# EAGLE board CT_schematic (EAGLE 7.6.0)

Size 100 x 80 mm. Coordinates in mm from the lower left corner, seen from the top.
Outline: 0,0 100,0 100,80 0,80 0,0
Copper layers (1*16): Top 0.035mm / dielectric 1.5mm / Bottom 0.035mm
Design rules "default": minimum track width 10mil, minimum drill 24mil, track to track 8mil, track to pad 8mil, pad to pad 8mil, via to via 8mil, smd to smd 8mil, copper to edge 40mil, drill to drill 8mil, minimum pad ring 10mil, minimum via ring 8mil, stop-mask expansion 4mil, vias tented up to drill 0mil, thermal gap 10mil

## Footprints (pad centres in the part's own frame; a part is rotated, then mirrored left to right if it is on the bottom)
C0603 = smd 0.8 x 0.8: 1 -0.762,0; 2 0.762,0
C0402 = smd 0.5 x 0.5: 1 -0.508,0; 2 0.508,0
C0805 = smd 1.2 x 1.3: 1 -1.016,0; 2 1.016,0
C1210 = smd 1.2 x 2.5: 1 -1.524,0; 2 1.524,0
EXV-9B = smd 2.718 x 1.778: 1 -2.108,0; 2 2.108,0
EXV-9H = smd 3.505 x 1.676: 1 -2.857,0; 2 2.857,0
L1210 = smd 1.2 x 2.5: 1 -1.524,0; 2 1.524,0
PJ-037B_PACKAGE = drill 3.7 square: 1 12,0 | drill 3.2 square: 2 6,0
R0603 = smd 0.8 x 0.8: 1 -0.762,0; 2 0.762,0
UFQFPN48 = smd 0.559 x 0.305: 1 -3.375,2.751; 2 -3.375,2.251; 3 -3.375,1.75; 4 -3.375,1.25; 5 -3.375,0.75; 6 -3.375,0.25; 7 -3.375,-0.25; 8 -3.375,-0.75; 9 -3.375,-1.25; 10 -3.375,-1.75; 11 -3.375,-2.251; 12 -3.375,-2.751; 25 3.375,-2.751; 26 3.375,-2.251; 27 3.375,-1.75; 28 3.375,-1.25; 29 3.375,-0.75; 30 3.375,-0.25; 31 3.375,0.25; 32 3.375,0.75; 33 3.375,1.25; 34 3.375,1.75; 35 3.375,2.251; 36 3.375,2.751 | smd 0.305 x 0.559: 13 -2.751,-3.375; 14 -2.251,-3.375; 15 -1.75,-3.375; 16 -1.25,-3.375; 17 -0.75,-3.375; 18 -0.25,-3.375; 19 0.25,-3.375; 20 0.75,-3.375; 21 1.25,-3.375; 22 1.75,-3.375; 23 2.251,-3.375; 24 2.751,-3.375; 37 2.751,3.375; 38 2.251,3.375; 39 1.75,3.375; 40 1.25,3.375; 41 0.75,3.375; 42 0.25,3.375; 43 -0.25,3.375; 44 -0.75,3.375; 45 -1.25,3.375; 46 -1.75,3.375; 47 -2.251,3.375; 48 -2.751,3.375 | smd 5.588 x 5.588: 49 0,0
SOT-23-8 = smd 0.4 x 1.2: 1 -0.975,-1.3; 2 -0.325,-1.3; 3 0.325,-1.3; 4 0.975,-1.3; 5 0.975,1.3; 6 0.325,1.3; 7 -0.325,1.3; 8 -0.975,1.3
182-009-MALE = drill 1.194 pad 1.524 octagon: 1 -5.537,10.923; 2 -2.769,10.923; 3 0,10.923; 4 2.769,10.923; 5 5.537,10.923; 6 -4.153,8.08; 7 -1.384,8.08; 8 1.384,8.08; 9 4.153,8.08 | hole 3.048: -12.446,9.501; 12.446,9.501
SSOP-20 = smd 1.651 x 0.432: 1 -3.48,2.925; 2 -3.48,2.275; 3 -3.48,1.625; 4 -3.48,0.975; 5 -3.48,0.325; 6 -3.48,-0.325; 7 -3.48,-0.975; 8 -3.48,-1.625; 9 -3.48,-2.275; 10 -3.48,-2.925; 11 3.48,-2.925; 12 3.48,-2.275; 13 3.48,-1.625; 14 3.48,-0.975; 15 3.48,-0.325; 16 3.48,0.325; 17 3.48,0.975; 18 3.48,1.625; 19 3.48,2.275; 20 3.48,2.925
HTSS-105-01-G-D = drill 1 pad 1.8 square: 1 0,0 | drill 1 pad 1.8: 2 0,2.54; 3 2.54,0; 4 2.54,2.54; 5 5.08,0; 6 5.08,2.54; 7 7.62,0; 8 7.62,2.54; 9 10.16,0; 10 10.16,2.54
TDFN-8/6MM = smd 0.3 x 0.75: 1 0,0; 2 0.5,0; 3 1,0; 4 1.5,0; 5 1.5,3; 6 1,3; 7 0.5,3; 8 0,3
TSSOP20-I = smd 0.4 x 1.35: 1 -2.925,-2.875; 2 -2.275,-2.875; 3 -1.625,-2.875; 4 -0.975,-2.875; 5 -0.325,-2.875; 6 0.325,-2.875; 7 0.975,-2.875; 8 1.625,-2.875; 9 2.275,-2.875; 10 2.925,-2.875; 11 2.925,2.875; 12 2.275,2.875; 13 1.625,2.875; 14 0.975,2.875; 15 0.325,2.875; 16 -0.325,2.875; 17 -0.975,2.875; 18 -1.625,2.875; 19 -2.275,2.875; 20 -2.925,2.875
QFN-28 = smd 0.813 x 0.305: 1 -2.451,1.5; 2 -2.451,1; 3 -2.451,0.5; 4 -2.451,0; 5 -2.451,-0.5; 6 -2.451,-1; 7 -2.451,-1.5; 15 2.451,-1.5; 16 2.451,-1; 17 2.451,-0.5; 18 2.451,0; 19 2.451,0.5; 20 2.451,1; 21 2.451,1.5 | smd 0.305 x 0.813: 8 -1.5,-2.451; 9 -1,-2.451; 10 -0.5,-2.451; 11 0,-2.451; 12 0.5,-2.451; 13 1,-2.451; 14 1.5,-2.451; 22 1.5,2.451; 23 1,2.451; 24 0.5,2.451; 25 0,2.451; 26 -0.5,2.451; 27 -1,2.451; 28 -1.5,2.451 | smd 3.607 x 3.607: 29 0,0
SJ-43515TS-SMT-TR = smd 2.2 x 3: 1 0.6,-7.4; 4 3.4,-7.4 | smd 3 x 3: 2 12.8,-7.4; 5 17,-3 | smd 2 x 3: 3 5.3,0; 6 2.5,0 | drill 1.8: P$7 4.5,-3.69; P$8 11.54,-3.69
ABS07-32.768KHZ-7-T = smd 1.1 x 2.4: 1 -2.5,0; 2 0,0
ABLS-25.000MHZ-B2F-T = smd 5.6 x 2.8: 1 -3.81,0; 2 5.69,0
ABLS-12.288MHZ-B4-T = smd 5.6 x 2.8: 1 -3.81,0; 2 5.69,0
LP2954 = smd 1.6 x 0.6: 1 -2.475,1.905 | smd 1.55 x 0.6: 2 -2.475,0.635; 3 -2.475,-0.635; 4 -2.475,-1.905; 5 2.475,-1.905; 6 2.475,-0.635; 7 2.475,0.635; 8 2.475,1.905
SON-6 = smd 0.55 x 0.3: 1 -0.355,0.5 | smd 0.52 x 0.3: 2 -0.37,0; 3 -0.37,-0.5; 4 0.37,-0.5; 5 0.37,0; 6 0.37,0.5
SW_4-1437565-2 = smd 1.4 x 2.1: 1 -2.23,4.55; 2 -2.23,-4.55; 3 2.23,4.55; 4 2.23,-4.55
LGM67K-G1J2-24-Z = smd 0.8 x 1.4: A -2,0; C 0,0
NC7SZ125M5X = smd 1.3 x 0.7: 1 -1.3,0.95; 2 -1.3,0; 3 -1.3,-0.95; 4 1.3,-0.95; 5 1.3,0.95

## Placement (x,y rotation side)
C1  1e-06  [C0603]  -48.26,81.28 0 top  (outside the outline)
C2  1e-07  [C0603]  -52.07,81.28 0 top  (outside the outline)
C3  1e-07  [C0603]  -55.88,81.28 0 top  (outside the outline)
C4  1e-07  [C0603]  -59.69,81.28 0 top  (outside the outline)
C5  1e-07  [C0603]  -63.5,81.28 0 top  (outside the outline)
C6  1e-07  [C0603]  -67.31,81.28 0 top  (outside the outline)
C7  4.7e-06  [C0603]  -44.45,81.28 0 top  (outside the outline)
C8  1e-08  [C0603]  -71.12,81.28 0 top  (outside the outline)
C9  1e-06  [C0603]  -74.93,81.28 0 top  (outside the outline)
C10  1e-07  [C0603]  -78.74,81.28 0 top  (outside the outline)
C11  1e-11  [C0402]  -66.04,86.36 0 top  (outside the outline)
C12  1e-11  [C0402]  -69.85,86.36 0 top  (outside the outline)
C13  1e-11  [C0402]  -73.66,86.36 0 top  (outside the outline)
C14  1e-11  [C0402]  -77.47,86.36 0 top  (outside the outline)
C15  1e-07  [C0402]  -81.28,86.36 0 top  (outside the outline)
C16  1e-06  [C0603]  -82.55,81.28 0 top  (outside the outline)
C17  1e-06  [C0603]  -86.36,81.28 0 top  (outside the outline)
C18  1e-06  [C0603]  -15.24,86.36 0 top  (outside the outline)
C19  4.7e-06  [C0805]  -71.12,68.58 0 top  (outside the outline)
C20  1e-08  [C0402]  -85.09,86.36 0 top  (outside the outline)
C21  1e-08  [C0402]  -15.24,91.44 0 top  (outside the outline)
C22  1e-07  [C0402]  -19.05,91.44 0 top  (outside the outline)
C23  1e-07  [C0402]  -22.86,91.44 0 top  (outside the outline)
C24  1e-07  [C0402]  -26.67,91.44 0 top  (outside the outline)
C25  1e-07  [C0402]  -30.48,91.44 0 top  (outside the outline)
C26  1e-07  [C0402]  -34.29,91.44 0 top  (outside the outline)
C27  1e-07  [C0402]  -38.1,91.44 0 top  (outside the outline)
C28  2.2e-05  [C1210]  -24.13,68.58 0 top  (outside the outline)
C29  2.2e-05  [C1210]  -30.48,68.58 0 top  (outside the outline)
C30  1e-09  [C0402]  -41.91,91.44 0 top  (outside the outline)
C31  1e-09  [C0402]  -45.72,91.44 0 top  (outside the outline)
C32  1e-07  [C0402]  -49.53,91.44 0 top  (outside the outline)
C33  1e-07  [C0402]  -53.34,91.44 0 top  (outside the outline)
C34  1e-07  [C0402]  -57.15,91.44 0 top  (outside the outline)
C35  1e-07  [C0402]  -60.96,91.44 0 top  (outside the outline)
C36  1e-07  [C0402]  -64.77,91.44 0 top  (outside the outline)
C37  1e-05  [C0805]  -76.2,68.58 0 top  (outside the outline)
C38  1e-05  [C0805]  -81.28,68.58 0 top  (outside the outline)
C39  1e-05  [C0805]  -86.36,68.58 0 top  (outside the outline)
C40  1e-05  [C0805]  -15.24,76.2 0 top  (outside the outline)
C41  1e-05  [C0805]  -20.32,76.2 0 top  (outside the outline)
C42  2.2e-11  [C0402]  -58.42,86.36 0 top  (outside the outline)
C43  2.2e-11  [C0402]  -62.23,86.36 0 top  (outside the outline)
C44  1e-06  [EXV-9B]  -48.26,68.58 0 top  (outside the outline)
C45  2.2e-06  [EXV-9B]  -57.15,68.58 0 top  (outside the outline)
C46  1e-07  [C0402]  -68.58,91.44 0 top  (outside the outline)
C47  0.0001  [EXV-9H]  -69.85,52.07 0 top  (outside the outline)
C48  0.0001  [EXV-9H]  -81.28,52.07 0 top  (outside the outline)
C49  1e-08  [C0402]  -72.39,91.44 0 top  (outside the outline)
I1  1.5e-05  [L1210]  -36.83,68.58 0 top  (outside the outline)
J1  PJ-037B  [PJ-037B_PACKAGE]  -55.88,29.21 0 top  (outside the outline)
R1  10000.0  [R0603]  -71.12,74.93 0 top  (outside the outline)
R2  1000.0  [R0603]  -19.05,86.36 0 top  (outside the outline)
R3  1600.5  [R0603]  -22.86,86.36 0 top  (outside the outline)
R4  4700.0  [R0603]  -26.67,86.36 0 top  (outside the outline)
R5  2200.0  [R0603]  -30.48,86.36 0 top  (outside the outline)
R6  2200.0  [R0603]  -34.29,86.36 0 top  (outside the outline)
R7  2200.0  [R0603]  -38.1,86.36 0 top  (outside the outline)
R8  2200.0  [R0603]  -41.91,86.36 0 top  (outside the outline)
R9  10000.0  [R0603]  -76.2,74.93 0 top  (outside the outline)
R10  120.0  [R0603]  -45.72,86.36 0 top  (outside the outline)
R11  100000.0  [R0603]  -30.48,74.93 0 top  (outside the outline)
R12  100000.0  [R0603]  -35.56,74.93 0 top  (outside the outline)
R13  100000.0  [R0603]  -40.64,74.93 0 top  (outside the outline)
R14  10000.0  [R0603]  -81.28,74.93 0 top  (outside the outline)
R15  10000.0  [R0603]  -86.36,74.93 0 top  (outside the outline)
R16  10000.0  [R0603]  -15.24,81.28 0 top  (outside the outline)
R17  47000.0  [R0603]  -20.32,81.28 0 top  (outside the outline)
R18  47000.0  [R0603]  -25.4,81.28 0 top  (outside the outline)
R19  47000.0  [R0603]  -30.48,81.28 0 top  (outside the outline)
R20  680.0  [R0603]  -49.53,86.36 0 top  (outside the outline)
R21  100000.0  [R0603]  -45.72,74.93 0 top  (outside the outline)
R22  100000.0  [R0603]  -50.8,74.93 0 top  (outside the outline)
R23  164658.62  [R0603]  -25.4,74.93 0 top  (outside the outline)
R24  100000.0  [R0603]  -55.88,74.93 0 top  (outside the outline)
R25  10000.0  [R0603]  -35.56,81.28 0 top  (outside the outline)
R26  10000.0  [R0603]  -40.64,81.28 0 top  (outside the outline)
R27  9100.0  [R0603]  -53.34,86.36 0 top  (outside the outline)
R28  680000.0  [R0603]  -60.96,74.93 0 top  (outside the outline)
R29  120000.0  [R0603]  -66.04,74.93 0 top  (outside the outline)
U1  STM32L433CBU6  [UFQFPN48]  -59.69,52.07 0 top  (outside the outline)
U2  MAX3051EKA+T  [SOT-23-8]  -41.91,68.58 0 top  (outside the outline)
U3  182-009-113R531  [182-009-MALE]  -36.83,6.35 0 top  (outside the outline)
U4  MAX3218EAP+T  [SSOP-20]  -49.53,52.07 0 top  (outside the outline)
U5  HTSS-105-01-G-D  [HTSS-105-01-G-D]  -43.18,40.64 0 top  (outside the outline)
U6  24AA00T-I/MNY  [TDFN-8/6MM]  -24.13,52.07 0 top  (outside the outline)
U7  24AA128T-I/MNY  [TDFN-8/6MM]  -77.47,40.64 0 top  (outside the outline)
U8  SP3203ECY-L/TR  [TSSOP20-I]  -24.13,41.91 0 top  (outside the outline)
U9  HTSS-105-01-G-D  [HTSS-105-01-G-D]  -62.23,40.64 0 top  (outside the outline)
U10  WM8731CLSEFL  [QFN-28]  -16.51,69.85 0 top  (outside the outline)
U11  SJ-43515TS-SMT-TR  [SJ-43515TS-SMT-TR]  -78.74,10.16 0 top  (outside the outline)
U12  SJ-43515TS-SMT-TR  [SJ-43515TS-SMT-TR]  -39.37,31.75 0 top  (outside the outline)
U13  ABS07-32.768KHZ-7-T  [ABS07-32.768KHZ-7-T]  -69.85,62.23 0 top  (outside the outline)
U14  ABLS-25.000MHZ-B2F-T  [ABLS-25.000MHZ-B2F-T]  -26.67,62.23 0 top  (outside the outline)
U15  ABLS-12.288MHZ-B4-T  [ABLS-12.288MHZ-B4-T]  -46.99,62.23 0 top  (outside the outline)
U16  LP2954AIMX/NOPB  [LP2954]  -39.37,52.07 0 top  (outside the outline)
U17  TPS3895ADRYR  [SON-6]  -74.93,90.17 0 top  (outside the outline)
U18  4-1437565-2  [SW_4-1437565-2]  -72.39,27.94 0 top  (outside the outline)
U19  Q65110A2395  [LGM67K-G1J2-24-Z]  -78.74,60.96 0 top  (outside the outline)
U20  nc7sz125m5x  [NC7SZ125M5X]  -64.77,68.58 0 top  (outside the outline)

## Library data of the parts
C1-C49 I1 J1 R1-R29 U1-U20 = circuit_tree

## Nets
CLK_CRYSTAL_U1_3: C11.1 U1.3 U13.1
CLK_CRYSTAL_U1_4: C12.1 U1.4 U13.2
CLK_CRYSTAL_U1_5: C13.1 U1.5 U14.1
CLK_CRYSTAL_U1_6: C14.1 U1.6 U14.2
CLK_CRYSTAL_U10_1: C42.1 U10.1 U15.1
CLK_CRYSTAL_U10_2: C43.1 U10.2 U15.2
GND: C1.2 C2.2 C3.2 C4.2 C5.2 C6.2 C7.2 C8.2 C9.2 C10.2 C11.2 C12.2 C13.2 C14.2 C15.2 C16.2 C17.2 C18.2 C20.2 C21.2 C22.2 C23.2 C26.2 C27.2 C31.2 C32.2 C33.2 C34.2 C35.2 C36.2 C37.2 C38.2 C39.2 C40.2 C41.2 C42.2 C43.2 C44.2 C45.2 C46.2 C47.2 C48.2 C49.2 J1.2 R2.2 R9.2 R14.2 R16.2 R17.2 R18.2 R19.2 R24.2 R27.2 R29.2 U1.8 U1.23 U1.35 U1.47 U1.49 U2.2 U2.8 U3.5 U4.5 U4.17 U4.20 U5.9 U6.4 U7.4 U8.18 U9.9 U10.4 U10.15 U10.19 U10.25 U10.26 U10.29 U11.1 U12.1 U16.4 U17.2 U19.C U20.1 U20.3
NET_U1_7: R4.1 U1.7 U20.4
NET_U1_21: R7.1 U1.21 U7.6
NET_U1_22: R8.1 U1.22 U7.5
NET_U1_31: R6.1 U1.31 U6.5
NET_U1_42: R5.1 U1.42 U6.6
NET_U1_44: R9.1 U1.44
NET_U1_45: R3.1 U1.45 U19.A
NET_U1_46: R1.1 U1.46 U18.3 U18.4
NET_U2_6: R10.2 U2.6
NET_U3_2: R10.2 U2.6 U3.2
NET_U3_3: R10.1 U2.7 U3.3
NET_U4_1: I1.1 U4.1
NET_U4_2: R11.1 U4.2
NET_U4_3: R12.1 U4.3
NET_U4_4: R13.1 U4.4
NET_U4_15: C18.1 U4.15
NET_U4_16: C19.2 U4.16
NET_U4_18: C19.1 U4.18
NET_U4_19: C17.1 U4.19
NET_U5_3: U4.12 U5.3
NET_U5_4: U4.11 U5.4
NET_U5_5: U4.14 U5.5
NET_U5_6: U4.13 U5.6
NET_U7_1: R14.1 U7.1
NET_U7_2: R15.1 U7.2
NET_U7_3: R16.1 U7.3
NET_U8_1: C24.1 U8.1
NET_U8_2: C26.1 U8.2
NET_U8_3: C24.2 U8.3
NET_U8_4: C25.1 U8.4
NET_U8_5: C25.2 U8.5
NET_U8_6: C27.1 U8.6
NET_U8_20: U8.20
NET_U9_3: U8.14 U9.3
NET_U9_4: U8.13 U9.4
NET_U9_5: U8.17 U9.5
NET_U9_6: U8.16 U9.6
NET_U10_9: U10.9
NET_U10_20: C36.1 C41.1 U10.20
NET_U11_2: C29.1 R18.1 U11.2
NET_U11_5: C28.1 R17.1 U11.5
NET_U11_13: C28.2
NET_U11_14: C29.2
NET_U12_5: C30.1 C31.1 R19.1 R20.1 U12.5
NET_U12_21: R20.2
NET_U12_22: C30.2
NET_U16_3: R22.1 U16.3
NET_U16_5: R21.1 U16.5
NET_U16_7: R23.2 R24.1 U16.7
NET_U17_1: R26.1 R27.1 U17.1
NET_U17_3: R28.2 R29.1 U17.3
NET_U17_4: R25.1 U17.4 U20.2
NET_U18_1: R2.1 U18.1 U18.2
PROC_CAN1_RX: U1.32 U2.4
PROC_CAN1_TX: U1.33 U2.1
PROC_LPUART1_CTS: U1.16 U4.8
PROC_LPUART1_RTS: U1.19 U4.10
PROC_LPUART1_RX: U1.13 U4.9
PROC_LPUART1_TX: U1.12 U4.7
PROC_SAI1_FS_A: U1.25 U10.9 U10.11
PROC_SAI1_SCK_A: U1.26 U10.7
PROC_SAI1_SD_A: U1.28 U10.8
PROC_USART1_CTS: U1.40 U8.8
PROC_USART1_RTS: U1.39 U8.10
PROC_USART1_RX: U1.43 U8.11
PROC_USART1_TX: U1.30 U8.7
VCC_S1_5V3: C44.1 C47.1 C48.1 J1.1 R22.2 U16.8
VCC_TIER1_3V3: C1.1 C2.1 C3.1 C4.1 C5.1 C6.1 C7.1 C8.1 C9.1 C10.1 C15.1 C16.1 C20.1 C21.1 C22.1 C23.1 C32.1 C33.1 C34.1 C35.1 C37.1 C38.1 C39.1 C40.1 C45.1 C46.1 C49.1 I1.2 R1.2 R3.2 R4.2 R5.2 R6.2 R7.2 R8.2 R11.2 R12.2 R13.2 R15.2 R21.2 R23.1 R25.2 R26.2 R28.1 U1.1 U1.9 U1.24 U1.36 U1.48 U2.3 U4.6 U6.8 U7.7 U7.8 U8.12 U8.19 U10.3 U10.5 U10.12 U10.18 U16.1 U17.6 U20.5

## Tracks (layer width: path | path; a pad name or v marks a point on that pad's centre or on a via)
CLK_CRYSTAL_U1_3  (2 unrouted)
CLK_CRYSTAL_U1_4  (2 unrouted)
CLK_CRYSTAL_U1_5  (2 unrouted)
CLK_CRYSTAL_U1_6  (2 unrouted)
CLK_CRYSTAL_U10_1  (2 unrouted)
CLK_CRYSTAL_U10_2  (2 unrouted)
GND  (82 unrouted)
NET_U1_7  (2 unrouted)
NET_U1_21  (2 unrouted)
NET_U1_22  (2 unrouted)
NET_U1_31  (2 unrouted)
NET_U1_42  (2 unrouted)
NET_U1_44  (1 unrouted)
NET_U1_45  (2 unrouted)
NET_U1_46  (3 unrouted)
NET_U2_6  (1 unrouted)
NET_U3_2  (2 unrouted)
NET_U3_3  (2 unrouted)
NET_U4_1  (1 unrouted)
NET_U4_2  (1 unrouted)
NET_U4_3  (1 unrouted)
NET_U4_4  (1 unrouted)
NET_U4_15  (1 unrouted)
NET_U4_16  (1 unrouted)
NET_U4_18  (1 unrouted)
NET_U4_19  (1 unrouted)
NET_U5_3  (1 unrouted)
NET_U5_4  (1 unrouted)
NET_U5_5  (1 unrouted)
NET_U5_6  (1 unrouted)
NET_U7_1  (1 unrouted)
NET_U7_2  (1 unrouted)
NET_U7_3  (1 unrouted)
NET_U8_1  (1 unrouted)
NET_U8_2  (1 unrouted)
NET_U8_3  (1 unrouted)
NET_U8_4  (1 unrouted)
NET_U8_5  (1 unrouted)
NET_U8_6  (1 unrouted)
NET_U9_3  (1 unrouted)
NET_U9_4  (1 unrouted)
NET_U9_5  (1 unrouted)
NET_U9_6  (1 unrouted)
NET_U10_20  (2 unrouted)
NET_U11_2  (2 unrouted)
NET_U11_5  (2 unrouted)
NET_U12_5  (4 unrouted)
NET_U16_3  (1 unrouted)
NET_U16_5  (1 unrouted)
NET_U16_7  (2 unrouted)
NET_U17_1  (2 unrouted)
NET_U17_3  (2 unrouted)
NET_U17_4  (2 unrouted)
NET_U18_1  (2 unrouted)
PROC_CAN1_RX  (1 unrouted)
PROC_CAN1_TX  (1 unrouted)
PROC_LPUART1_CTS  (1 unrouted)
PROC_LPUART1_RTS  (1 unrouted)
PROC_LPUART1_RX  (1 unrouted)
PROC_LPUART1_TX  (1 unrouted)
PROC_SAI1_FS_A  (2 unrouted)
PROC_SAI1_SCK_A  (1 unrouted)
PROC_SAI1_SD_A  (1 unrouted)
PROC_USART1_CTS  (1 unrouted)
PROC_USART1_RTS  (1 unrouted)
PROC_USART1_RX  (1 unrouted)
PROC_USART1_TX  (1 unrouted)
VCC_S1_5V3  (5 unrouted)
VCC_TIER1_3V3  (62 unrouted)